# EAGLE board FR4%20Panel%20Rev%20A.brd (EAGLE 7.2.0)
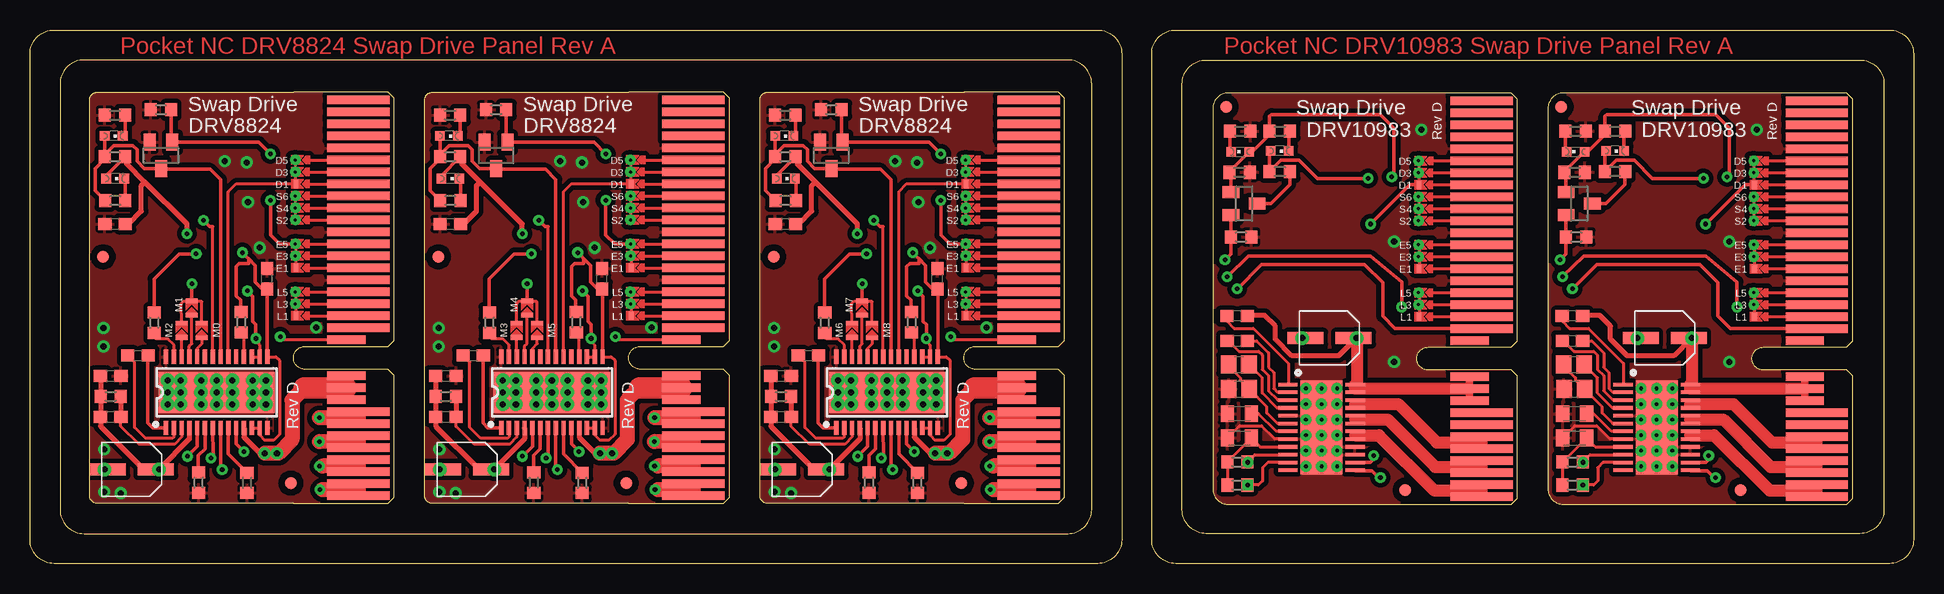
[diagram p0: board, top side]
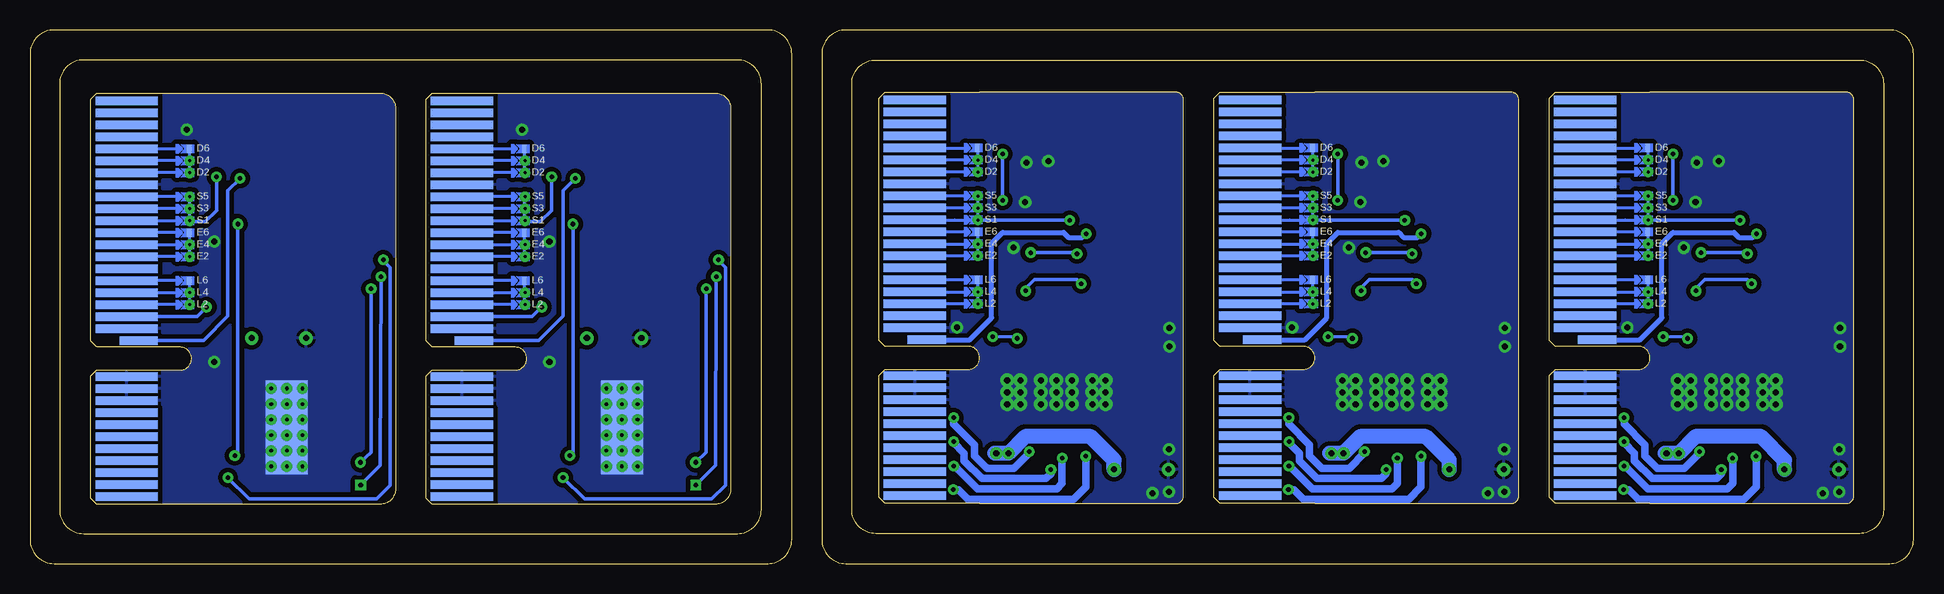
[diagram p1: board, bottom side, seen from below]

Size 157 x 44.5 mm. Coordinates in mm from the lower left corner, seen from the top.
Outline: 115.59,39.24 99.86,39.24 arc90 98.59,37.97 98.59,6.21 arc90 99.86,4.94 115.59,4.94
Outline: 21.96,5 5.59,5 arc-90 4.96,5.64 4.96,38.67 arc-90 5.59,39.3 21.96,39.3
Outline: 49.9,5 33.53,5 arc-90 32.9,5.64 32.9,38.67 arc-90 33.53,39.3 49.9,39.3
Outline: 77.84,5 61.47,5 arc-90 60.84,5.64 60.84,38.67 arc-90 61.47,39.3 77.84,39.3
Outline: 143.53,39.24 127.8,39.24 arc90 126.53,37.97 126.53,6.21 arc90 127.8,4.94 143.53,4.94
Outline: 2.5,40 2.5,4.5 arc90 4.5,2.5 86.5,2.5 arc90 88.5,4.5 88.5,40 arc90 86.5,42 4.5,42 arc90 2.5,40
Outline: 2,44.5 89,44.5 arc-90 91,42.5 91,2 arc-90 89,0 2,0 arc-90 0,2 0,42.5 arc-90 2,44.5
Outline: 152.54,2.5 98.04,2.5 arc-90 96.04,4.5 96.04,40 arc-90 98.04,42 152.54,42 arc-90 154.54,40 154.54,4.5 arc-90 152.54,2.5
Outline: 155,0 95.5,0 arc-90 93.5,2 93.5,42.5 arc-90 95.5,44.5 155,44.5 arc-90 157,42.5 157,2 arc-90 155,0
Copper layers (1*16): Top 0.035mm / dielectric 1.5mm / Bottom 0.035mm
Design rules "SparkFun *": minimum track width 8mil, minimum drill 20mil, track to track 15mil, track to pad 8mil, pad to pad 8mil, via to via 8mil, smd to smd 8mil, copper to edge 2mil, drill to drill 8mil, minimum pad ring 12mil, minimum via ring 10mil, stop-mask expansion 4mil, vias tented up to drill 0.7mm, thermal gap 10mil

## Footprints (pad centres in the part's own frame; a part is rotated, then mirrored left to right if it is on the bottom)
SOT23 = smd 1 x 1.4: 1 -0.95,-1.1; 2 0.95,-1.1; 3 0,1.1
C0603 = smd 1.1 x 1: 1 -0.85,0; 2 0.85,0
C0805K = smd 1.1 x 1.4: 1 -1,0; 2 1,0
C0805 = smd 1.3 x 1.5: 1 -0.85,0; 2 0.85,0
HTSSOP-28 = smd 0.36 x 1.19: 1 -4.225,-2.97; 2 -3.575,-2.97; 3 -2.925,-2.97; 4 -2.275,-2.97; 5 -1.625,-2.97; 6 -0.975,-2.97; 7 -0.325,-2.97; 8 0.325,-2.97; 9 0.975,-2.97; 10 1.625,-2.97; 11 2.275,-2.97; 12 2.925,-2.97; 13 3.575,-2.97; 14 4.225,-2.97; 15 4.225,2.97; 16 3.575,2.97; 17 2.925,2.97; 18 2.275,2.97; 19 1.625,2.97; 20 0.975,2.97; 21 0.325,2.97; 22 -0.325,2.97; 23 -0.975,2.97; 24 -1.625,2.97; 25 -2.275,2.97; 26 -2.925,2.97; 27 -3.575,2.97; 28 -4.225,2.97 | drill 0.508: GND@10 -4.1,1; GND@11 -4.1,0; GND@12 -4.1,-1; GND@13 -3,-1; GND@14 -3,0; GND@15 -3,1; GND@16 -1.3,1; GND@17 -1.3,0; GND@18 -1.3,-1; GND@19 0,-1; GND@20 0,0; GND@21 0,1; GND@22 1.3,1; GND@23 1.3,0; GND@24 1.3,-1; GND@25 3,-1; GND@26 3,0; GND@27 3,1; GND@28 4.1,1; GND@29 4.1,0; GND@30 4.1,-1 | smd 9.7 x 3.4: GND@PAD 0,0
CHIPLED_0603 = smd 0.8 x 0.8: A 0,-0.75; C 0,0.75
SELECTIVE_CONNECT = smd 0.4 x 1: P$1 0,0; P$2 1.2,0
R0603 = smd 1 x 1.1: 1 -0.85,0; 2 0.85,0
PCIE_64_SMART_BOARD = smd 0.7 x 5.2 bottom: GND@1 8.65,3; GND@2 9.65,3; GND@3 10.65,3; P$1 0.65,3; P$2 1.65,3; P$3 2.65,3; P$4 3.65,3; P$5 4.65,3; P$6 5.65,3; P$7 6.65,3; P$8 7.65,3; P$13 14.65,3; P$14 15.65,3; P$15 16.65,3; P$16 17.65,3; P$17 18.65,3; P$18 19.65,3; P$19 20.65,3; P$20 21.65,3; P$21 22.65,3; P$22 23.65,3; P$23 24.65,3; P$24 25.65,3; P$25 26.65,3; P$26 27.65,3; P$27 28.65,3; P$28 29.65,3; P$29 30.65,3; P$30 31.65,3; P$31 32.65,3; P$32 33.65,3 | smd 0.7 x 3.2 bottom: P$12 13.65,4 | smd 0.7 x 0.4 bottom: P$15@1 16.65,8.2; P$16@1 17.65,8.2; P$17@1 18.65,8.2; P$19@1 20.65,8.2; P$20@1 21.65,8.2; P$21@1 22.65,8.2; P$22@1 23.65,8.2; P$23@1 24.65,8.2; P$24@1 25.65,8.2; P$26@1 27.65,8.2; P$27@1 28.65,8.2; P$28@1 29.65,8.2 | smd 0.7 x 5.2: P$33 0.65,3; P$34 1.65,3; P$35 2.65,3; P$36 3.65,3; P$37 4.65,3; P$38 5.65,3; P$39 6.65,3; P$40 7.65,3; P$45 14.65,3; P$46 15.65,3; P$47 16.65,3; P$48 17.65,3; P$49 18.65,3; P$50 19.65,3; P$51 20.65,3; P$52 21.65,3; P$53 22.65,3; P$54 23.65,3; P$55 24.65,3; P$56 25.65,3; P$57 26.65,3; P$58 27.65,3; P$59 28.65,3; P$60 29.65,3; P$61 30.65,3; P$62 31.65,3; P$63 32.65,3; P$64 33.65,3 | drill 0.254 pad 0.305: P$41 21.65,8.25; P$42 17.65,8.25; P$43 16.65,8.25; P$65 20.65,8.25; P$66 23.65,8.25; P$67 24.65,8.25; P$68 27.65,8.25; P$69 28.65,8.25; P$70 25.65,8.25 | smd 0.7 x 3.2: P$44 13.65,4; VCC@1 8.65,4; VCC@2 9.65,4; VCC@3 10.65,4 | smd 0.7 x 0.4: P$46@1 15.65,8.2; P$47@1 16.65,8.2; P$48@1 17.65,8.2; P$50@1 19.65,8.2; P$51@1 20.65,8.2; P$52@1 21.65,8.2; P$54@1 23.65,8.2; P$55@1 24.65,8.2; P$56@1 25.65,8.2; P$57@1 26.65,8.2; P$58@1 27.65,8.2; P$59@1 28.65,8.2
HTSS0P-24 = smd 7.8 x 3.5 bottom: GND 0,0 | smd 7.8 x 3.5: GND@1 0,0 | drill 0.3: GND@3 -3.25,1.3; GND@4 -1.95,1.3; GND@5 -0.65,1.3; GND@6 0.65,1.3; GND@7 1.95,1.3; GND@8 3.25,1.3; GND@9 3.25,0; GND@10 1.95,0; GND@11 0.65,0; GND@12 -0.65,0; GND@13 -1.95,0; GND@14 -3.25,0; GND@15 -3.25,-1.3; GND@16 -1.95,-1.3; GND@17 -0.65,-1.3; GND@18 0.65,-1.3; GND@19 1.95,-1.3; GND@20 3.25,-1.3 | smd 0.3 x 1.6: P$1 -3.575,-2.8; P$2 -2.925,-2.8; P$3 -2.275,-2.8; P$4 -1.625,-2.8; P$5 -0.975,-2.8; P$6 -0.325,-2.8; P$7 0.325,-2.8; P$8 0.975,-2.8; P$9 1.625,-2.8; P$10 2.275,-2.8; P$11 2.925,-2.8; P$12 3.575,-2.8; P$13 3.575,2.8; P$14 2.925,2.8; P$15 2.275,2.8; P$16 1.625,2.8; P$17 0.975,2.8; P$18 0.325,2.8; P$19 -0.325,2.8; P$20 -0.975,2.8; P$21 -1.625,2.8; P$22 -2.275,2.8; P$23 -2.925,2.8; P$24 -3.575,2.8
EEEFK0J220R = smd 1 x 3: GND@1 0,-2; P$1 0,2 | drill 0.508: GND@2 0,-2.27; P$3 0,2.27
FIDUCIAL_1MM = smd 1 x 1: 1 0,0

## Placement (x,y rotation side)
2N7002P  [SOT23]  10.92,34.04 180 top
2N7002P1  [SOT23]  101.2,30.02 270 top
2N7002P2  [SOT23]  38.86,34.04 180 top
2N7002P3  [SOT23]  66.8,34.04 180 top
2N7002P4  [SOT23]  129.14,30.02 270 top
C1  4.7uf  [C0603]  19.76,23.76 90 top
C2  .1uf  [C0603]  100.62,20.64 180 top
C3  .1uf  [C0603]  100.63,18.57 0 top
C4  [C0805K]  100.82,12.5 0 top
C5  10uf  [C0805]  100.78,14.55 0 top
C6  .01uf  [C0603]  9,17.35 0 top
C7  [C0805K]  100.82,10.47 0 top
C8  .1uf  [C0603]  6.73,15.66 0 top
C9  .1uf  [C0603]  6.73,12.24 0 top
C10  .1uf  [C0603]  7.09,28.32 0 top
C11  4.7uf  [C0603]  47.7,23.76 90 top
C12  .01uf  [C0603]  36.94,17.35 0 top
C13  .1uf  [C0603]  34.67,15.66 0 top
C14  .1uf  [C0603]  34.67,12.24 0 top
C15  .1uf  [C0603]  35.03,28.32 0 top
C16  4.7uf  [C0603]  75.64,23.76 90 top
C17  .01uf  [C0603]  64.88,17.35 0 top
C18  .1uf  [C0603]  62.61,15.66 0 top
C19  .1uf  [C0603]  62.61,12.24 0 top
C20  .1uf  [C0603]  62.97,28.32 0 top
C21  .1uf  [C0603]  128.56,20.64 180 top
C22  .1uf  [C0603]  128.57,18.57 0 top
C23  10uf  [C0805]  128.72,14.55 0 top
C24  [C0805K]  128.76,10.47 0 top
C25  [C0805K]  128.76,12.5 0 top
DRV1  DRV8824  [HTSSOP-28]  43.5,14.28 0 top
DRV2  DRV8824  [HTSSOP-28]  71.44,14.28 0 top
DRV8824  DRV8824  [HTSSOP-28]  15.56,14.28 0 top
GRN  [CHIPLED_0603]  7.11,32.11 270 top
GRN1  [CHIPLED_0603]  104.18,34.41 270 top
GRN2  [CHIPLED_0603]  35.05,32.11 270 top
GRN3  [CHIPLED_0603]  62.99,32.11 270 top
GRN4  [CHIPLED_0603]  132.12,34.41 270 top
L1  47uh  [C0805]  100.76,16.61 0 top
L2  47uh  [C0805]  128.7,16.61 0 top
M0  SELECTIVE_CONNECT  [SELECTIVE_CONNECT]  14.33,18.83 90 top
M1  SELECTIVE_CONNECT  [SELECTIVE_CONNECT]  13.48,20.7 90 top
M2  SELECTIVE_CONNECT  [SELECTIVE_CONNECT]  12.64,18.85 90 top
M3  SELECTIVE_CONNECT  [SELECTIVE_CONNECT]  40.58,18.85 90 top
M4  SELECTIVE_CONNECT  [SELECTIVE_CONNECT]  41.42,20.7 90 top
M5  SELECTIVE_CONNECT  [SELECTIVE_CONNECT]  42.27,18.83 90 top
M6  SELECTIVE_CONNECT  [SELECTIVE_CONNECT]  68.52,18.85 90 top
M7  SELECTIVE_CONNECT  [SELECTIVE_CONNECT]  69.36,20.7 90 top
M8  SELECTIVE_CONNECT  [SELECTIVE_CONNECT]  70.21,18.83 90 top
R1  5k  [R0603]  100.64,8.47 0 top
R2  5k  [R0603]  100.64,6.54 0 top
R3  460  [R0603]  104.18,32.69 180 top
R4  10k  [R0603]  100.82,32.63 180 top
R5  10k  [R0603]  100.94,27.23 0 top
R6  10k  [R0603]  17.61,20.13 90 top
R7  10k  [R0603]  10.36,20.08 90 top
R8  [R0603]  14.06,6.75 90 top
R9  [R0603]  18.09,6.73 90 top
R10  460  [R0603]  100.88,36.06 0 top
R11  460  [R0603]  104.18,36.06 180 top
R12  1m  [R0603]  6.73,13.93 0 top
R13  10k  [R0603]  10.92,37.85 0 top
R14  460  [R0603]  7.08,33.93 0 top
R15  460  [R0603]  7.08,37.39 180 top
R16  460  [R0603]  7.11,30.28 180 top
R17  10k  [R0603]  45.55,20.13 90 top
R18  10k  [R0603]  38.3,20.08 90 top
R19  [R0603]  42,6.75 90 top
R20  [R0603]  46.03,6.73 90 top
R21  1m  [R0603]  34.67,13.93 0 top
R22  10k  [R0603]  38.86,37.85 0 top
R23  460  [R0603]  35.02,33.93 0 top
R24  460  [R0603]  35.02,37.39 180 top
R25  460  [R0603]  35.05,30.28 180 top
R26  10k  [R0603]  73.49,20.13 90 top
R27  10k  [R0603]  66.24,20.08 90 top
R28  [R0603]  69.94,6.75 90 top
R29  [R0603]  73.97,6.73 90 top
R30  1m  [R0603]  62.61,13.93 0 top
R31  10k  [R0603]  66.8,37.85 0 top
R32  460  [R0603]  62.96,33.93 0 top
R33  460  [R0603]  62.96,37.39 180 top
R34  460  [R0603]  62.99,30.28 180 top
R35  5k  [R0603]  128.58,8.47 0 top
R36  5k  [R0603]  128.58,6.54 0 top
R37  460  [R0603]  132.12,32.69 180 top
R38  10k  [R0603]  128.76,32.63 180 top
R39  10k  [R0603]  128.88,27.23 0 top
R40  460  [R0603]  128.82,36.06 0 top
R41  460  [R0603]  132.12,36.06 180 top
RED  [CHIPLED_0603]  6.98,35.66 270 top
RED1  [CHIPLED_0603]  100.88,34.34 90 top
RED2  [CHIPLED_0603]  34.92,35.66 270 top
RED3  [CHIPLED_0603]  62.86,35.66 270 top
RED4  [CHIPLED_0603]  128.82,34.34 90 top
U$1  [PCIE_64_SMART_BOARD]  123.99,4.94 90 top
U$2  DRV10983  [HTSS0P-24]  107.65,11.35 270 top
U$3  10uf  [EEEFK0J220R]  108.31,18.81 270 top
U$4  FIDUCIAL  [FIDUCIAL_1MM]  99.69,38.09 90 top
U$5  FIDUCIAL  [FIDUCIAL_1MM]  114.64,6.13 90 top
U$6  [PCIE_64_SMART_BOARD]  30.36,5 90 top
U$7  EEEFK0J220R  [EEEFK0J220R]  8.49,7.85 270 top
U$8  FIDUCIAL  [FIDUCIAL_1MM]  21.75,6.71 90 top
U$9  FIDUCIAL  [FIDUCIAL_1MM]  6.1,25.58 90 top
U$10  [PCIE_64_SMART_BOARD]  58.3,5 90 top
U$11  EEEFK0J220R  [EEEFK0J220R]  36.43,7.85 270 top
U$12  FIDUCIAL  [FIDUCIAL_1MM]  49.69,6.71 90 top
U$13  FIDUCIAL  [FIDUCIAL_1MM]  34.04,25.58 90 top
U$14  [PCIE_64_SMART_BOARD]  86.24,5 90 top
U$15  EEEFK0J220R  [EEEFK0J220R]  64.37,7.85 270 top
U$16  FIDUCIAL  [FIDUCIAL_1MM]  77.63,6.71 90 top
U$17  FIDUCIAL  [FIDUCIAL_1MM]  61.98,25.58 90 top
U$18  [PCIE_64_SMART_BOARD]  151.93,4.94 90 top
U$19  DRV10983  [HTSS0P-24]  135.59,11.35 270 top
U$20  10uf  [EEEFK0J220R]  136.25,18.81 270 top
U$21  FIDUCIAL  [FIDUCIAL_1MM]  127.63,38.09 90 top
U$22  FIDUCIAL  [FIDUCIAL_1MM]  142.58,6.13 90 top

## Library data of the parts
2N7002P 2N7002P1-2N7002P4 C1-C25 GRN GRN1-GRN4 L1 L2 R1-R41 RED RED1-RED4 U$4 U$5 U$8 U$9 U$12 U$13 U$16 U$17 U$21 U$22 = adafruit
DRV1 DRV2 DRV8824 M0 M1-M8 U$1-U$3 U$6 U$7 U$10 U$11 U$14 U$15 U$18-U$20 = PocketNC

## Nets
3.3V: C1.1 DRV8824.12 DRV8824.13 DRV8824.15 R6.2 R7.2
3.3V1: C11.1 DRV1.12 DRV1.13 DRV1.15 R17.2 R18.2
3.3V2: C16.1 DRV2.12 DRV2.13 DRV2.15 R26.2 R27.2
3V: GRN1.A R3.2 U$1.P$12
3V1: C10.2 GRN.A R14.2 U$6.P$12
3V2: C15.2 GRN2.A R23.2 U$10.P$12
3V3: C20.2 GRN3.A R32.2 U$14.P$12
3V4: GRN4.A R37.2 U$18.P$12
5V: DRV8824.16 DRV8824.17 M0.P$2 M1.P$2 M2.P$2 U$6.P$44
5V1: DRV1.16 DRV1.17 M3.P$2 M4.P$2 M5.P$2 U$10.P$44
5V2: DRV2.16 DRV2.17 M6.P$2 M7.P$2 M8.P$2 U$14.P$44
A1: DRV8824.5 U$6.P$33 U$6.P$34
A2: DRV8824.7 U$6.P$35 U$6.P$36
A3: DRV1.5 U$10.P$33 U$10.P$34
A4: DRV1.7 U$10.P$35 U$10.P$36
A5: DRV2.5 U$14.P$33 U$14.P$34
A6: DRV2.7 U$14.P$35 U$14.P$36
B1: DRV8824.10 U$6.P$39 U$6.P$40
B2: DRV8824.8 U$6.P$37 U$6.P$38
B3: DRV1.8 U$10.P$37 U$10.P$38
B4: DRV1.10 U$10.P$39 U$10.P$40
B5: DRV2.8 U$14.P$37 U$14.P$38
B6: DRV2.10 U$14.P$39 U$14.P$40
DIR: U$1.P$57@1 U$2.P$14
DIR1: DRV8824.20 U$6.P$57@1
DIR2: DRV1.20 U$10.P$57@1
DIR3: DRV2.20 U$14.P$57@1
DIR4: U$18.P$57@1 U$19.P$14
ENBL: 2N7002P1.1 R4.2 R11.2 RED1.A U$1.P$22@1
ENBL1: 2N7002P4.1 R38.2 R41.2 RED4.A U$18.P$22@1
ENBL-IN: 2N7002P.1 R13.2 U$6.P$50@1
ENBL-IN1: 2N7002P2.1 R22.2 U$10.P$50@1
ENBL-IN2: 2N7002P3.1 R31.2 U$14.P$50@1
ENBL-OUT: 2N7002P.3 DRV8824.21 R14.1 R16.2 RED.A
ENBL-OUT1: 2N7002P2.3 DRV1.21 R23.1 R25.2 RED2.A
ENBL-OUT2: 2N7002P3.3 DRV2.21 R32.1 R34.2 RED3.A
GND: C4.1 C5.1 C7.1 R4.1 R5.2 R10.2 U$1.GND@1 U$1.GND@2 U$1.GND@3 U$1.P$13 U$1.P$25 U$1.P$49 U$1.P$53 U$1.P$60 U$2.GND U$2.GND@1 U$2.GND@3 U$2.GND@4 U$2.GND@5 U$2.GND@6 U$2.GND@7 U$2.GND@8 U$2.GND@9 U$2.GND@10 U$2.GND@11 U$2.GND@12 U$2.GND@13 U$2.GND@14 U$2.GND@15 U$2.GND@16 U$2.GND@17 U$2.GND@18 U$2.GND@19 U$2.GND@20 U$2.P$5 U$2.P$8 U$2.P$15 U$2.P$16 U$3.GND@2
GND1: 2N7002P.2 C1.2 C8.2 C10.1 DRV8824.14 DRV8824.28 DRV8824.GND@10 DRV8824.GND@11 DRV8824.GND@12 DRV8824.GND@13 DRV8824.GND@14 DRV8824.GND@15 DRV8824.GND@16 DRV8824.GND@17 DRV8824.GND@18 DRV8824.GND@19 DRV8824.GND@20 DRV8824.GND@21 DRV8824.GND@22 DRV8824.GND@23 DRV8824.GND@24 DRV8824.GND@25 DRV8824.GND@26 DRV8824.GND@27 DRV8824.GND@28 DRV8824.GND@29 DRV8824.GND@30 DRV8824.GND@PAD R8.1 R9.1 R13.1 R15.2 U$6.GND@1 U$6.GND@2 U$6.GND@3 U$6.P$13 U$6.P$25 U$6.P$49 U$6.P$53 U$6.P$60 U$7.GND@2
GND2: 2N7002P2.2 C11.2 C13.2 C15.1 DRV1.14 DRV1.28 DRV1.GND@10 DRV1.GND@11 DRV1.GND@12 DRV1.GND@13 DRV1.GND@14 DRV1.GND@15 DRV1.GND@16 DRV1.GND@17 DRV1.GND@18 DRV1.GND@19 DRV1.GND@20 DRV1.GND@21 DRV1.GND@22 DRV1.GND@23 DRV1.GND@24 DRV1.GND@25 DRV1.GND@26 DRV1.GND@27 DRV1.GND@28 DRV1.GND@29 DRV1.GND@30 DRV1.GND@PAD R19.1 R20.1 R22.1 R24.2 U$10.GND@1 U$10.GND@2 U$10.GND@3 U$10.P$13 U$10.P$25 U$10.P$49 U$10.P$53 U$10.P$60 U$11.GND@2
GND3: 2N7002P3.2 C16.2 C18.2 C20.1 DRV2.14 DRV2.28 DRV2.GND@10 DRV2.GND@11 DRV2.GND@12 DRV2.GND@13 DRV2.GND@14 DRV2.GND@15 DRV2.GND@16 DRV2.GND@17 DRV2.GND@18 DRV2.GND@19 DRV2.GND@20 DRV2.GND@21 DRV2.GND@22 DRV2.GND@23 DRV2.GND@24 DRV2.GND@25 DRV2.GND@26 DRV2.GND@27 DRV2.GND@28 DRV2.GND@29 DRV2.GND@30 DRV2.GND@PAD R28.1 R29.1 R31.1 R33.2 U$14.GND@1 U$14.GND@2 U$14.GND@3 U$14.P$13 U$14.P$25 U$14.P$49 U$14.P$53 U$14.P$60 U$15.GND@2
GND4: C23.1 C24.1 C25.1 R38.1 R39.2 R40.2 U$18.GND@1 U$18.GND@2 U$18.GND@3 U$18.P$13 U$18.P$25 U$18.P$49 U$18.P$53 U$18.P$60 U$19.GND U$19.GND@1 U$19.GND@3 U$19.GND@4 U$19.GND@5 U$19.GND@6 U$19.GND@7 U$19.GND@8 U$19.GND@9 U$19.GND@10 U$19.GND@11 U$19.GND@12 U$19.GND@13 U$19.GND@14 U$19.GND@15 U$19.GND@16 U$19.GND@17 U$19.GND@18 U$19.GND@19 U$19.GND@20 U$19.P$5 U$19.P$8 U$19.P$15 U$19.P$16 U$20.GND@2
N$1: C2.2 U$2.P$1
N$2: C3.2 U$2.P$2
N$3: C3.1 U$2.P$3
N$4: DRV8824.6 R8.2
N$5: R10.1 RED1.C
N$6: C4.2 U$2.P$7
N$7: C6.2 DRV8824.1
N$8: GRN1.C R11.1
N$9: 2N7002P1.3 R3.1
N$10: C6.1 DRV8824.2
N$11: DRV8824.9 R9.2
N$12: DRV8824.18 R6.1
N$13: GRN.C R16.1
N$14: R15.1 RED.C
N$15: DRV1.6 R19.2
N$16: DRV8824.27 R7.1
N$17: DRV8824.26 M2.P$1
N$18: DRV8824.25 M1.P$1
N$19: DRV8824.24 M0.P$1
N$20: DRV1.27 R18.1
N$21: DRV1.26 M3.P$1
N$22: DRV1.25 M4.P$1
N$23: DRV1.24 M5.P$1
N$24: C12.2 DRV1.1
N$25: C12.1 DRV1.2
N$26: DRV1.9 R20.2
N$27: DRV1.18 R17.1
N$28: GRN2.C R25.1
N$29: R24.1 RED2.C
N$30: DRV2.6 R28.2
N$31: DRV2.27 R27.1
N$32: DRV2.26 M6.P$1
N$33: DRV2.25 M7.P$1
N$34: DRV2.24 M8.P$1
N$35: C17.2 DRV2.1
N$36: C17.1 DRV2.2
N$37: DRV2.9 R29.2
N$38: DRV2.18 R26.1
N$39: GRN3.C R34.1
N$40: R33.1 RED3.C
N$41: C21.2 U$19.P$1
N$42: C22.2 U$19.P$2
N$43: C22.1 U$19.P$3
N$44: C25.2 U$19.P$7
N$45: 2N7002P4.3 R37.1
N$46: R40.1 RED4.C
N$47: GRN4.C R41.1
PWM: 2N7002P1.2 R5.1 U$2.P$13
PWM1: 2N7002P4.2 R39.1 U$19.P$13
SCL: R1.2 U$1.P$45 U$2.P$10
SCL1: R35.2 U$18.P$45 U$19.P$10
SDA: R2.2 U$1.P$14 U$2.P$11
SDA1: R36.2 U$18.P$14 U$19.P$11
STEP: DRV8824.22 U$6.P$22@1
STEP1: DRV1.22 U$10.P$22@1
STEP2: DRV2.22 U$14.P$22@1
SW: L1.2 U$2.P$4
SW1: L2.2 U$19.P$4
U: U$1.P$33 U$1.P$34 U$2.P$17 U$2.P$18
U1: U$18.P$33 U$18.P$34 U$19.P$17 U$19.P$18
V: U$1.P$35 U$1.P$36 U$2.P$19 U$2.P$20
V1: U$18.P$35 U$18.P$36 U$19.P$19 U$19.P$20
V3P1: C24.2 R35.1 R36.1 U$19.P$9
V3P3: C7.2 R1.1 R2.1 U$2.P$9
VCC: C2.1 U$1.VCC@1 U$1.VCC@2 U$1.VCC@3 U$2.P$23 U$2.P$24 U$3.P$3
VCC1: C8.1 C9.1 DRV8824.4 DRV8824.11 R12.1 U$6.VCC@1 U$6.VCC@2 U$6.VCC@3 U$7.P$3
VCC2: C13.1 C14.1 DRV1.4 DRV1.11 R21.1 U$10.VCC@1 U$10.VCC@2 U$10.VCC@3 U$11.P$3
VCC3: C18.1 C19.1 DRV2.4 DRV2.11 R30.1 U$14.VCC@1 U$14.VCC@2 U$14.VCC@3 U$15.P$3
VCC4: C21.1 U$18.VCC@1 U$18.VCC@2 U$18.VCC@3 U$19.P$23 U$19.P$24 U$20.P$3
VCP: C9.2 DRV8824.3 R12.2
VCP1: C14.2 DRV1.3 R21.2
VCP2: C19.2 DRV2.3 R30.2
VREG: C5.2 L1.1 U$2.P$6
VREG1: C23.2 L2.1 U$19.P$6
W: U$1.P$37 U$1.P$38 U$2.P$21 U$2.P$22
W1: U$18.P$37 U$18.P$38 U$19.P$21 U$19.P$22

## Tracks (layer width: path | path; a pad name or v marks a point on that pad's centre or on a via)
3.3V  (via drill 0.38)
  Top 0.254: DRV8824.12 DRV8824.13 19.14,10.71 19.58,10.27 20.3,10.27 20.81,10.78 20.81,16.93 20.49,17.25 DRV8824.15
  Top 0.305: DRV8824.15 19.79,22.88 C1.1 19.37,22.91 18.78,23.5 18.78,24.87 18.22,25.43 | R6.2 17.56,21.03 17.56,21.97 17.2,22.33 17.2,24.77 17.46,25.02 18.22,25.02 18.22,25.43 | 18.22,25.43 18.07,25.58 v17.71,25.93 | v13.85,25.83 12.43,25.83 10.34,23.75 10.34,20.95 R7.2
  Bottom 0.305: v17.71,25.93 13.95,25.93 v13.85,25.83
3.3V1  (via drill 0.38)
  Top 0.254: DRV1.12 DRV1.13 47.08,10.71 47.52,10.27 48.24,10.27 48.75,10.78 48.75,16.93 48.43,17.25 DRV1.15
  Top 0.305: DRV1.15 47.73,22.88 C11.1 47.31,22.91 46.72,23.5 46.72,24.87 46.16,25.43 | R17.2 45.5,21.03 45.5,21.97 45.14,22.33 45.14,24.77 45.4,25.02 46.16,25.02 46.16,25.43 | 46.16,25.43 46.01,25.58 v45.65,25.93 | v41.79,25.83 40.37,25.83 38.28,23.75 38.28,20.95 R18.2
  Bottom 0.305: v45.65,25.93 41.89,25.93 v41.79,25.83
3.3V2  (via drill 0.38)
  Top 0.254: DRV2.12 DRV2.13 75.02,10.71 75.46,10.27 76.18,10.27 76.69,10.78 76.69,16.93 76.37,17.25 DRV2.15
  Top 0.305: DRV2.15 75.67,22.88 C16.1 75.25,22.91 74.66,23.5 74.66,24.87 74.1,25.43 | R26.2 73.44,21.03 73.44,21.97 73.08,22.33 73.08,24.77 73.34,25.02 74.1,25.02 74.1,25.43 | 74.1,25.43 73.95,25.58 v73.59,25.93 | v69.73,25.83 68.31,25.83 66.22,23.75 66.22,20.95 R27.2
  Bottom 0.305: v73.59,25.93 69.83,25.93 v69.73,25.83
3V  (via drill 0.38)
  Top 0.305: GRN1.A 103.33,34.31 R3.2 104.28,33.65 105.77,33.65 107.29,32.12 v111.55,32.12
  Bottom 0.305: U$1.P$12 114.6,18.59 112.56,20.63 112.56,31.11 v111.55,32.12
3V1  (via drill 0.38)
  Top 0.305: GRN.A 6.36,32.36 R14.2 8.06,33.81 8.06,33.35
  Top 0.406: v13.09,27.51 13.09,28.32 9.58,31.83 | 9.58,31.83 8.06,33.35 | C10.2 8.21,28.32 9.28,29.39 9.28,31.52 9.58,31.83
  Bottom 0.406: U$6.P$12 22.81,18.65 20.96,20.5 20.96,26.7 20.05,27.61 14.97,27.61 14.56,27.2 13.39,27.2 v13.09,27.51
3V2  (via drill 0.38)
  Top 0.305: GRN2.A 34.3,32.36 R23.2 36,33.81 36,33.35
  Top 0.406: v41.03,27.51 41.03,28.32 37.52,31.83 | 37.52,31.83 36,33.35 | C15.2 36.15,28.32 37.22,29.39 37.22,31.52 37.52,31.83
  Bottom 0.406: U$10.P$12 50.75,18.65 48.9,20.5 48.9,26.7 47.99,27.61 42.91,27.61 42.5,27.2 41.33,27.2 v41.03,27.51
3V3  (via drill 0.38)
  Top 0.305: GRN3.A 62.24,32.36 R32.2 63.94,33.81 63.94,33.35
  Top 0.406: v68.97,27.51 68.97,28.32 65.46,31.83 | 65.46,31.83 63.94,33.35 | C20.2 64.09,28.32 65.16,29.39 65.16,31.52 65.46,31.83
  Bottom 0.406: U$14.P$12 78.69,18.65 76.84,20.5 76.84,26.7 75.93,27.61 70.85,27.61 70.44,27.2 69.27,27.2 v68.97,27.51
3V4  (via drill 0.38)
  Top 0.305: GRN4.A 131.27,34.31 R37.2 132.22,33.65 133.71,33.65 135.23,32.12 v139.49,32.12
  Bottom 0.305: U$18.P$12 142.54,18.59 140.5,20.63 140.5,31.11 v139.49,32.12
5V  (via drill 0.38)
  Top 0.254: DRV8824.17 DRV8824.16 19.13,18.21 18.83,18.52 v18.83,18.77 | M2.P$2 12.61,21.69 12.81,21.88 13.48,21.88 M1.P$2 13.58,21.86 14.28,21.86 14.33,21.81 M0.P$2 | U$6.P$44 21.13,18.65 v20.86,18.92
  Top 0.305: v18.83,18.77 18.83,19.94 18.58,20.19 18.58,22.28 v18.12,22.73 | v13.49,23.34 13.49,21.92 M1.P$2
  Bottom 0.254: v20.86,18.92 18.98,18.92 v18.83,18.77
  Bottom 0.305: v18.12,22.73 18.12,22.99 17.41,23.7 13.85,23.7 v13.49,23.34
5V1  (via drill 0.38)
  Top 0.254: DRV1.17 DRV1.16 47.07,18.21 46.77,18.52 v46.77,18.77 | M3.P$2 40.56,21.69 40.75,21.88 41.42,21.88 M4.P$2 41.52,21.86 42.22,21.86 42.27,21.81 M5.P$2 | U$10.P$44 49.07,18.65 v48.8,18.92
  Top 0.305: v46.77,18.77 46.77,19.94 46.52,20.19 46.52,22.28 v46.06,22.73 | v41.44,23.34 41.44,21.92 M4.P$2
  Bottom 0.254: v48.8,18.92 46.92,18.92 v46.77,18.77
  Bottom 0.305: v46.06,22.73 46.06,22.99 45.35,23.7 41.79,23.7 v41.44,23.34
5V2  (via drill 0.38)
  Top 0.254: DRV2.17 DRV2.16 75.01,18.21 74.71,18.52 v74.71,18.77 | M6.P$2 68.5,21.69 68.69,21.88 69.36,21.88 M7.P$2 69.46,21.86 70.16,21.86 70.21,21.81 M8.P$2 | U$14.P$44 77.01,18.65 v76.74,18.92
  Top 0.305: v74.71,18.77 74.71,19.94 74.45,20.19 74.45,22.28 v74,22.73 | v69.38,23.34 69.38,21.92 M7.P$2
  Bottom 0.254: v76.74,18.92 74.86,18.92 v74.71,18.77
  Bottom 0.305: v74,22.73 74,22.99 73.29,23.7 69.73,23.7 v69.38,23.34
A1  (via drill 0.38)
  Top 0.254: U$6.P$34 27.36,6.15 | 24.38,6.16 24.39,6.15
  Top 0.305: DRV8824.5 13.94,9.77 v13.11,8.94 | U$6.P$33 27.36,6.15
  Top 0.61: v24.16,6.16 24.38,6.16
  Top 1.27: 27.36,6.15 24.39,6.15
  Bottom 0.61: v13.11,8.94 13.11,6.39 14.14,5.36 22.92,5.36 23.72,6.16 v24.16,6.16
A2  (via drill 0.38)
  Top 0.254: U$6.P$36 27.36,8.13 | 24.38,8.12 24.39,8.13
  Top 0.305: DRV8824.7 15.25,8.97 v15.08,8.8 | U$6.P$35 27.36,8.13
  Top 0.61: v24.12,8.13 24.38,8.12
  Top 1.27: 27.36,8.13 24.39,8.13
  Bottom 0.61: v15.08,8.8 15.08,6.67 15.53,6.22 22.16,6.22 24.06,8.13 v24.12,8.13
A3  (via drill 0.38)
  Top 0.254: U$10.P$34 55.3,6.15 | 52.32,6.16 52.33,6.15
  Top 0.305: DRV1.5 41.88,9.77 v41.05,8.94 | U$10.P$33 55.3,6.15
  Top 0.61: v52.1,6.16 52.32,6.16
  Top 1.27: 55.3,6.15 52.33,6.15
  Bottom 0.61: v41.05,8.94 41.05,6.39 42.08,5.36 50.86,5.36 51.66,6.16 v52.1,6.16
A4  (via drill 0.38)
  Top 0.254: U$10.P$36 55.3,8.13 | 52.32,8.12 52.33,8.13
  Top 0.305: DRV1.7 43.19,8.97 v43.02,8.8 | U$10.P$35 55.3,8.13
  Top 0.61: v52.06,8.13 52.32,8.12
  Top 1.27: 55.3,8.13 52.33,8.13
  Bottom 0.61: v43.02,8.8 43.02,6.67 43.47,6.22 50.1,6.22 52,8.13 v52.06,8.13
A5  (via drill 0.38)
  Top 0.254: U$14.P$34 83.24,6.15 | 80.26,6.16 80.27,6.15
  Top 0.305: DRV2.5 69.82,9.77 v68.99,8.94 | U$14.P$33 83.24,6.15
  Top 0.61: v80.04,6.16 80.26,6.16
  Top 1.27: 83.24,6.15 80.27,6.15
  Bottom 0.61: v68.99,8.94 68.99,6.39 70.02,5.36 78.8,5.36 79.6,6.16 v80.04,6.16
A6  (via drill 0.38)
  Top 0.254: U$14.P$36 83.24,8.13 | 80.26,8.12 80.27,8.13
  Top 0.305: DRV2.7 71.13,8.97 v70.96,8.8 | U$14.P$35 83.24,8.13
  Top 0.61: v80,8.13 80.26,8.12
  Top 1.27: 83.24,8.13 80.27,8.13
  Bottom 0.61: v70.96,8.8 70.96,6.67 71.41,6.22 78.04,6.22 79.94,8.13 v80,8.13
B1  (via drill 0.38)
  Top 0.254: U$6.P$40 27.36,12.15
  Top 0.305: DRV8824.10 17.19,9.96 v17.83,9.32 | U$6.P$39 27.36,12.15
  Top 1.27: 27.36,12.15 v24.12,12.15
  Bottom 0.61: v17.83,9.32 17.83,9.22 19.1,7.95 21.36,7.95 22.4,8.99 22.4,9.91 24.12,11.63 v24.12,12.15
B2  (via drill 0.38)
  Top 0.254: U$6.P$38 27.36,10.16
  Top 0.305: DRV8824.8 15.89,7.97 v16.02,7.84 | U$6.P$37 27.36,10.11 27.31,10.16
  Top 1.27: 27.36,10.16 27.31,10.16 v24.11,10.17
  Bottom 0.61: v16.02,7.84 16.02,7.48 16.42,7.09 21.77,7.09 23.26,8.57 23.26,9.21 24.11,10.06 v24.11,10.17
B3  (via drill 0.38)
  Top 0.254: U$10.P$38 55.3,10.16
  Top 0.305: DRV1.8 43.83,7.97 v43.96,7.84 | U$10.P$37 55.3,10.11 55.25,10.16
  Top 1.27: 55.3,10.16 55.25,10.16 v52.05,10.17
  Bottom 0.61: v43.96,7.84 43.96,7.48 44.36,7.09 49.72,7.09 51.2,8.57 51.2,9.21 52.05,10.06 v52.05,10.17
B4  (via drill 0.38)
  Top 0.254: U$10.P$40 55.3,12.15
  Top 0.305: DRV1.10 45.13,9.96 v45.77,9.32 | U$10.P$39 55.3,12.15
  Top 1.27: 55.3,12.15 v52.06,12.15
  Bottom 0.61: v45.77,9.32 45.77,9.22 47.03,7.95 49.3,7.95 50.34,8.99 50.34,9.91 52.06,11.63 v52.06,12.15
B5  (via drill 0.38)
  Top 0.254: U$14.P$38 83.24,10.16
  Top 0.305: DRV2.8 71.77,7.97 v71.9,7.84 | U$14.P$37 83.24,10.11 83.19,10.16
  Top 1.27: 83.24,10.16 83.19,10.16 v79.99,10.17
  Bottom 0.61: v71.9,7.84 71.9,7.48 72.3,7.09 77.66,7.09 79.14,8.57 79.14,9.21 79.99,10.06 v79.99,10.17
B6  (via drill 0.38)
  Top 0.254: U$14.P$40 83.24,12.15
  Top 0.305: DRV2.10 73.07,9.96 v73.71,9.32 | U$14.P$39 83.24,12.15
  Top 1.27: 83.24,12.15 v80,12.15
  Bottom 0.61: v73.71,9.32 73.71,9.22 74.97,7.95 77.24,7.95 78.28,8.99 78.28,9.91 80,11.63 v80,12.15
DIR  (via drill 0.38)
  Top 0.305: U$1.P$57@1 115.02,31.59 v111.74,28.31 | v111.99,9.01 111.99,8.69 111.74,8.44 110.46,8.44 U$2.P$14
  Bottom 0.305: v111.74,28.31 111.74,9.26 v111.99,9.01
DIR1
  Top 0.254: DRV8824.20 16.54,31.01 17.2,31.67 22.14,31.67 U$6.P$57@1
DIR2
  Top 0.254: DRV1.20 44.48,31.01 45.14,31.67 50.08,31.67 U$10.P$57@1
DIR3
  Top 0.254: DRV2.20 72.42,31.01 73.08,31.67 78.02,31.67 U$14.P$57@1
DIR4  (via drill 0.38)
  Top 0.305: U$18.P$57@1 142.96,31.59 v139.68,28.31 | v139.93,9.01 139.93,8.69 139.68,8.44 138.4,8.44 U$19.P$14
  Bottom 0.305: v139.68,28.31 139.68,9.26 v139.93,9.01
ENBL  (via drill 0.38)
  Top 0.305: 2N7002P1.1 100.1,32.5 R4.2 99.97,32.68 RED1.A 101.9,34.34 103.1,35.55 103.1,35.83 R11.2 103.33,37.3 103.48,37.45 112.56,37.45 113.71,36.31 113.71,32.44 v113.52,32.25
  Bottom 0.305: v113.52,32.25 113.52,29.45 114.47,28.5 115.7,28.5 U$1.P$22@1
ENBL1  (via drill 0.38)
  Top 0.305: 2N7002P4.1 128.04,32.5 R38.2 127.91,32.68 RED4.A 129.84,34.34 131.04,35.55 131.04,35.83 R41.2 131.27,37.3 131.42,37.45 140.5,37.45 141.65,36.31 141.65,32.44 v141.46,32.25
  Bottom 0.305: v141.46,32.25 141.46,29.45 142.41,28.5 143.64,28.5 U$18.P$22@1
ENBL-IN  (via drill 0.38)
  Top 0.305: R13.2 11.77,35.24 2N7002P.1 19.08,35.14 v20.05,34.16 | 22.16,26.7 22.1,26.64 20.81,26.64 20.05,27.41 v20.05,30.3
  Bottom 0.305: v20.05,34.16 v20.05,30.3
ENBL-IN1  (via drill 0.38)
  Top 0.305: R22.2 39.71,35.24 2N7002P2.1 47.02,35.14 v47.99,34.16 | 50.1,26.7 50.04,26.64 48.75,26.64 47.99,27.41 v47.99,30.3
  Bottom 0.305: v47.99,34.16 v47.99,30.3
ENBL-IN2  (via drill 0.38)
  Top 0.305: R31.2 67.65,35.24 2N7002P3.1 74.95,35.14 v75.93,34.16 | 78.04,26.7 77.98,26.64 76.69,26.64 75.93,27.41 v75.93,30.3
  Bottom 0.305: v75.93,34.16 v75.93,30.3
ENBL-OUT
  Top 0.305: RED.A R14.1 | R14.1 6.23,33.76 5.42,32.94 5.42,31.12 R16.2 | R14.1 6.23,34.11 6.99,34.87 8.57,34.87 8.92,34.52 8.92,33.55 9.53,32.94 10.91,32.94 2N7002P.3 10.96,32.89 15.02,32.89 15.89,32.02 DRV8824.21
ENBL-OUT1
  Top 0.305: RED2.A R23.1 | R23.1 34.17,33.76 33.36,32.94 33.36,31.12 R25.2 | R23.1 34.17,34.11 34.93,34.87 36.51,34.87 36.86,34.52 36.86,33.55 37.47,32.94 2N7002P2.3 38.9,32.89 42.96,32.89 43.83,32.02 DRV1.21
ENBL-OUT2
  Top 0.305: RED3.A R32.1 | R32.1 62.11,33.76 61.3,32.94 61.3,31.12 R34.2 | R32.1 62.11,34.11 62.87,34.87 64.45,34.87 64.8,34.52 64.8,33.55 65.41,32.94 2N7002P3.3 66.84,32.89 70.9,32.89 71.77,32.02 DRV2.21
GND  (via drill 0.51)
  Top 0.254: C7.1 100.82,11.47 100.82,11.48 102.66,11.48 103.76,10.38 U$2.P$8
  other vias: 115.99,36.18 113.71,16.82 113.71,26.85
  pour Top: 98.5,4.96 120.99,4.96 120.99,39.18 98.5,39.18
  pour Bottom: 98.5,4.96 120.99,4.96 120.99,39.18 98.5,39.18
GND1  (via drill 0.51)
  other vias: 6.18,9.52 6.13,18.11 6.13,19.63 18.17,30.15 19.13,26.34 18.07,33.45 16.24,33.55 6.18,5.97 7.55,5.87 23.86,19.68
  pour Bottom: 4.96,4.93 4.87,39.5 28.3,39.46 28.39,4.89
  pour Top: 4.95,4.93 4.88,39.52 28.29,39.45 28.42,4.93
GND2  (via drill 0.51)
  other vias: 34.12,9.52 34.07,18.11 34.07,19.63 46.11,30.15 47.07,26.34 46.01,33.45 44.18,33.55 34.12,5.97 35.49,5.87 51.8,19.68
  pour Bottom: 32.9,4.93 32.81,39.5 56.24,39.46 56.33,4.89
  pour Top: 32.89,4.93 32.82,39.52 56.23,39.45 56.36,4.93
GND3  (via drill 0.51)
  other vias: 62.06,9.52 62.01,18.11 62.01,19.63 74.05,30.15 75.01,26.34 73.95,33.45 72.12,33.55 62.06,5.97 63.43,5.87 79.74,19.68
  pour Bottom: 60.84,4.93 60.75,39.5 84.18,39.46 84.27,4.89
  pour Top: 60.83,4.93 60.76,39.52 84.17,39.45 84.3,4.93
GND4  (via drill 0.51)
  Top 0.254: C24.1 128.76,11.47 128.76,11.48 130.6,11.48 131.7,10.38 U$19.P$8
  other vias: 143.93,36.18 141.65,16.82 141.65,26.85
  pour Top: 126.44,4.96 148.93,4.96 148.93,39.18 126.44,39.18
  pour Bottom: 126.44,4.96 148.93,4.96 148.93,39.18 126.44,39.18
N$1
  Top 0.254: C2.2 99.77,20.21 100.37,19.61 101.96,19.61 104.88,16.69 104.88,14.95 U$2.P$1
N$2
  Top 0.254: C3.2 102.24,18.57 103.23,17.58 103.23,16.37 103.67,15.93 103.67,14.6 103.99,14.28 U$2.P$2
N$3
  Top 0.254: C3.1 99.89,18.57 100.75,17.71 102.41,17.71 102.72,17.39 102.72,16.18 103.23,15.67 103.23,14.4 104.01,13.63 U$2.P$3
N$4
  Top 0.305: DRV8824.6 14.59,9.55 14.04,9 14.04,7.62 R8.2
N$5
  Top 0.305: R10.1 100.03,34.44 RED1.C
N$6
  Top 0.254: U$2.P$7 103.88,11.03 102.41,12.5 C4.2
N$7
  Top 0.305: DRV8824.1 10.21,11.31 9.81,11.71 9.81,17.31 C6.2
N$8
  Top 0.305: GRN1.C 104.93,35.96 R11.1
N$9
  Top 0.305: 2N7002P1.3 103.42,30.02 105.01,31.61 105.01,32.67 R3.1
N$10
  Top 0.254: DRV8824.2 11.99,10.56 11.87,10.44 9.63,10.44 8.72,11.35 8.72,16.79 C6.1
N$11
  Top 0.305: DRV8824.9 16.54,9.13 R9.2
N$12
  Top 0.254: DRV8824.18 17.84,19.3 R6.1
N$13
  Top 0.305: R16.1 7.96,32.01 GRN.C
N$14
  Top 0.305: R15.1 7.93,35.86 RED.C
N$15
  Top 0.305: DRV1.6 42.53,9.55 41.98,9 41.98,7.62 R19.2
N$16
  Top 0.254: DRV8824.27 12.01,18.22 11.49,18.75 10.52,18.75 R7.1
N$17
  Top 0.254: DRV8824.26 12.64,19.18 M2.P$1
N$18
  Top 0.254: DRV8824.25 13.29,18.13 13.48,18.33 M1.P$1
N$19
  Top 0.254: DRV8824.24 13.94,17.93 14.35,18.34 14.35,19.18 M0.P$1
N$20
  Top 0.254: DRV1.27 39.95,18.22 39.43,18.75 38.45,18.75 R18.1
N$21
  Top 0.254: DRV1.26 40.58,19.18 M3.P$1
N$22
  Top 0.254: DRV1.25 41.23,18.13 41.42,18.33 M4.P$1
N$23
  Top 0.254: DRV1.24 41.88,17.93 42.29,18.34 42.29,19.18 M5.P$1
N$24
  Top 0.305: DRV1.1 38.15,11.31 37.75,11.71 37.75,17.31 C12.2
N$25
  Top 0.254: DRV1.2 39.93,10.56 39.81,10.44 37.57,10.44 36.66,11.35 36.66,16.79 C12.1
N$26
  Top 0.305: DRV1.9 44.48,9.13 R20.2
N$27
  Top 0.254: DRV1.18 45.78,19.3 R17.1
N$28
  Top 0.305: R25.1 35.9,32.01 GRN2.C
N$29
  Top 0.305: R24.1 35.87,35.86 RED2.C
N$30
  Top 0.305: DRV2.6 70.47,9.55 69.92,9 69.92,7.62 R28.2
N$31
  Top 0.254: DRV2.27 67.89,18.22 67.37,18.75 66.39,18.75 R27.1
N$32
  Top 0.254: DRV2.26 68.52,19.18 M6.P$1
N$33
  Top 0.254: DRV2.25 69.17,18.13 69.36,18.33 M7.P$1
N$34
  Top 0.254: DRV2.24 69.82,17.93 70.23,18.34 70.23,19.18 M8.P$1
N$35
  Top 0.305: DRV2.1 66.09,11.31 65.69,11.71 65.69,17.31 C17.2
N$36
  Top 0.254: DRV2.2 67.87,10.56 67.75,10.44 65.51,10.44 64.6,11.35 64.6,16.79 C17.1
N$37
  Top 0.305: DRV2.9 72.42,9.13 R29.2
N$38
  Top 0.254: DRV2.18 73.72,19.3 R26.1
N$39
  Top 0.305: R34.1 63.84,32.01 GRN3.C
N$40
  Top 0.305: R33.1 63.81,35.86 RED3.C
N$41
  Top 0.254: C21.2 127.71,20.21 128.31,19.61 129.9,19.61 132.82,16.69 132.82,14.95 U$19.P$1
N$42
  Top 0.254: C22.2 130.18,18.57 131.17,17.58 131.17,16.37 131.61,15.93 131.61,14.6 131.93,14.28 U$19.P$2
N$43
  Top 0.254: C22.1 127.83,18.57 128.69,17.71 130.34,17.71 130.66,17.39 130.66,16.18 131.17,15.67 131.17,14.4 131.95,13.63 U$19.P$3
N$44
  Top 0.254: U$19.P$7 131.82,11.03 130.34,12.5 C25.2
N$45
  Top 0.305: 2N7002P4.3 131.36,30.02 132.95,31.61 132.95,32.67 R37.1
N$46
  Top 0.305: R40.1 127.97,34.44 RED4.C
N$47
  Top 0.305: GRN4.C 132.87,35.96 R41.1
PWM  (via drill 0.38)
  Top 0.305: 2N7002P1.2 R5.1 100.09,25.81 v99.61,25.33 | v112.56,7.17 112.44,7.17 111.87,7.74 110.5,7.74 U$2.P$13
  Bottom 0.305: v99.61,25.33 99.36,25.01 99.04,24.69 99.04,6.53 100.18,5.39 110.79,5.39 v112.56,7.17
PWM1  (via drill 0.38)
  Top 0.305: 2N7002P4.2 R39.1 128.03,25.81 v127.55,25.33 | v140.5,7.17 140.38,7.17 139.81,7.74 138.44,7.74 U$19.P$13
  Bottom 0.305: v127.55,25.33 127.3,25.01 126.98,24.69 126.98,6.53 128.12,5.39 138.73,5.39 v140.5,7.17
SCL  (via drill 0.38)
  Top 0.254: R1.2 102.1,9.08 U$2.P$10
  Top 0.305: v101.52,8.44 101.53,8.44 R1.2 | U$1.P$45 113.79,19.59 112.75,20.63 112.75,23.42 111.23,24.95 102.66,24.95 v100.63,22.91
  Bottom 0.305: v101.52,8.44 101.49,8.46 R1.2 100.63,9.28 v100.63,22.91
SCL1  (via drill 0.38)
  Top 0.254: R35.2 130.04,9.08 U$19.P$10
  Top 0.305: v129.46,8.44 129.47,8.44 R35.2 | U$18.P$45 141.73,19.59 140.69,20.63 140.69,23.42 139.17,24.95 130.6,24.95 v128.57,22.91
  Bottom 0.305: v129.46,8.44 129.44,8.46 R35.2 128.57,9.28 v128.57,22.91
SDA  (via drill 0.38)
  Top 0.254: 101.69,6.54 R2.2 102.39,6.54 102.74,6.89 102.74,7.99 103.18,8.43 U$2.P$11
  Top 0.305: v114.34,21.39 114.34,23.48 111.74,25.64 101.58,25.64 v99.8,23.93
  Bottom 0.305: U$1.P$14 115.14,20.59 v114.34,21.39 | v99.8,23.93 99.86,8.17 R2.2
  other vias: 101.49,6.54
SDA1  (via drill 0.38)
  Top 0.254: 129.63,6.54 R36.2 130.33,6.54 130.69,6.89 130.69,7.99 131.12,8.43 U$19.P$11
  Top 0.305: v142.28,21.39 142.28,23.48 139.68,25.64 129.52,25.64 v127.74,23.93
  Bottom 0.305: U$18.P$14 143.08,20.59 v142.28,21.39 | v127.74,23.93 127.8,8.17 R36.2
  other vias: 129.43,6.54
STEP  (via drill 0.38)
  Top 0.254: DRV8824.22 15.24,28.1
  Top 0.305: 15.24,28.1 14.98,28.1 v14.46,28.63
  Bottom 0.254: 24.05,28.66 22.69,28.66 U$6.P$22@1
  Bottom 0.305: v14.46,28.63 22.66,28.63 22.69,28.66
STEP1  (via drill 0.38)
  Top 0.254: DRV1.22 43.18,28.1
  Top 0.305: 43.18,28.1 42.92,28.1 v42.4,28.63
  Bottom 0.254: 51.99,28.66 50.63,28.66 U$10.P$22@1
  Bottom 0.305: v42.4,28.63 50.6,28.63 50.63,28.66
STEP2  (via drill 0.38)
  Top 0.254: DRV2.22 71.12,28.1
  Top 0.305: 71.12,28.1 70.86,28.1 v70.34,28.63
  Bottom 0.254: 79.93,28.66 78.57,28.66 U$14.P$22@1
  Bottom 0.305: v70.34,28.63 78.54,28.63 78.57,28.66
SW
  Top 0.254: U$2.P$4 103.96,12.98 102.72,14.21 102.72,15.5 L1.2
SW1
  Top 0.254: U$19.P$4 131.9,12.98 130.66,14.21 130.66,15.5 L2.2
U
  Top 0.254: U$1.P$33 120.99,6.08 | U$2.P$18 110.45,10.71
  Top 0.305: 110.45,10.71 U$2.P$17
  Top 0.61: U$1.P$34 120.99,6.08
  Top 1.016: 110.45,10.71 112.45,10.71 117.07,6.08 120.99,6.08
U1
  Top 0.254: U$18.P$33 148.94,6.08 | U$19.P$18 138.39,10.71
  Top 0.305: 138.39,10.71 U$19.P$17
  Top 0.61: U$18.P$34 148.94,6.08
  Top 1.016: 138.39,10.71 140.39,10.71 145.01,6.08 148.94,6.08
V
  Top 0.254: U$2.P$20 110.45,12 | U$1.P$35 120.99,8.09
  Top 0.305: 110.45,12 U$2.P$19
  Top 0.61: U$1.P$36 120.99,8.09
  Top 1.016: 110.45,12 113.19,12 117.14,8.05 120.96,8.05 120.99,8.09
V1
  Top 0.254: U$19.P$20 138.39,12 | U$18.P$35 148.94,8.09
  Top 0.305: 138.39,12 U$19.P$19
  Top 0.61: U$18.P$36 148.94,8.09
  Top 1.016: 138.39,12 141.13,12 145.08,8.05 148.9,8.05 148.94,8.09
V3P1
  Top 0.254: R36.1 R35.1 127.76,8.47 C24.2 130.5,9.73 U$19.P$9
V3P3
  Top 0.254: R2.1 R1.1 99.82,8.47 C7.2 102.56,9.73 U$2.P$9
VCC
  Top 0.254: U$2.P$23 110.45,14.59
  Top 0.406: U$3.P$3 110.55,18.81 109.07,17.32 105.2,17.32 103.8,18.72 103.8,19.8 102.91,20.69 101.52,20.69 C2.1
  Top 0.61: U$1.VCC@1 U$1.VCC@2 U$1.VCC@3
  Top 1.016: U$1.VCC@2 110.45,14.59 U$2.P$24 110.58,15.06 U$3.P$3
VCC1  (via drill 0.51)
  Top 0.305: U$6.VCC@1 U$6.VCC@2 U$6.VCC@3
  Top 0.406: C8.1 R12.1 C9.1 5.88,11.45 9.48,7.85 U$7.P$3 13.29,10.38 DRV8824.4 | DRV8824.11 17.84,10.54 19.06,9.32 19.44,9.32 v19.56,9.2
  Top 1.27: 22.87,14.65 21.85,13.64 21.85,10.34 20.71,9.2 v20.58,9.2 v19.56,9.2
  Top 1.778: U$6.VCC@2 22.87,14.65
  Bottom 1.27: U$7.P$3 10.76,8.64 12.71,10.59 18.17,10.59 v19.56,9.2 v20.58,9.2 20.71,9.2
VCC2  (via drill 0.51)
  Top 0.305: U$10.VCC@1 U$10.VCC@2 U$10.VCC@3
  Top 0.406: C13.1 R21.1 C14.1 33.82,11.45 37.42,7.85 U$11.P$3 41.23,10.38 DRV1.4 | DRV1.11 45.78,10.54 47,9.32 47.38,9.32 v47.5,9.2
  Top 1.27: 50.81,14.65 49.79,13.64 49.79,10.34 48.65,9.2 v48.52,9.2 v47.5,9.2
  Top 1.778: U$10.VCC@2 50.81,14.65
  Bottom 1.27: U$11.P$3 38.7,8.64 40.65,10.59 46.11,10.59 v47.5,9.2 v48.52,9.2 48.65,9.2
VCC3  (via drill 0.51)
  Top 0.305: U$14.VCC@1 U$14.VCC@2 U$14.VCC@3
  Top 0.406: C18.1 R30.1 C19.1 61.76,11.45 65.36,7.85 U$15.P$3 69.17,10.38 DRV2.4 | DRV2.11 73.72,10.54 74.94,9.32 75.32,9.32 v75.44,9.2
  Top 1.27: 78.75,14.65 77.73,13.64 77.73,10.34 76.59,9.2 v76.46,9.2 v75.44,9.2
  Top 1.778: U$14.VCC@2 78.75,14.65
  Bottom 1.27: U$15.P$3 66.64,8.64 68.59,10.59 74.05,10.59 v75.44,9.2 v76.46,9.2 76.59,9.2
VCC4
  Top 0.254: U$19.P$23 138.39,14.59
  Top 0.406: U$20.P$3 138.49,18.81 137.01,17.32 133.14,17.32 131.74,18.72 131.74,19.8 130.85,20.69 129.46,20.69 C21.1
  Top 0.61: U$18.VCC@1 U$18.VCC@2 U$18.VCC@3
  Top 1.016: U$18.VCC@2 138.39,14.59 U$19.P$24 138.52,15.06 U$20.P$3
VCP
  Top 0.254: DRV8824.3 12.64,10.55 12.05,9.96 9.1,9.96 7.58,11.43 C9.2
  Top 0.406: R12.2 C9.2
VCP1
  Top 0.254: DRV1.3 40.58,10.55 39.99,9.96 37.04,9.96 35.52,11.43 C14.2
  Top 0.406: R21.2 C14.2
VCP2
  Top 0.254: DRV2.3 68.52,10.55 67.93,9.96 64.98,9.96 63.46,11.43 C19.2
  Top 0.406: R30.2 C19.2
VREG
  Top 0.254: L1.1 99.91,16.46 100.88,15.48 100.88,15.3 C5.2 | C5.2 101.63,14.48 | U$2.P$6 103.99,11.68 103.1,12.56 103.1,13.08 C5.2
VREG1
  Top 0.254: L2.1 127.85,16.46 128.82,15.48 128.82,15.3 C23.2 | C23.2 129.57,14.48 | U$19.P$6 131.93,11.68 131.04,12.56 131.04,13.08 C23.2
W
  Top 0.254: U$2.P$22 110.45,13.3 | U$1.P$37 120.99,10.1
  Top 0.305: 110.45,13.3 U$2.P$21
  Top 0.61: U$1.P$38 120.99,10.09 120.82,10.09
  Top 1.016: 110.45,13.3 114.05,13.3 117.26,10.09 120.82,10.09 120.98,10.09 120.99,10.1
W1
  Top 0.254: U$19.P$22 138.39,13.3 | U$18.P$37 148.94,10.1
  Top 0.305: 138.39,13.3 U$19.P$21
  Top 0.61: U$18.P$38 148.94,10.09 148.76,10.09
  Top 1.016: 138.39,13.3 141.99,13.3 145.2,10.09 148.76,10.09 148.92,10.09 148.94,10.1

## Text on the board
Top: Pocket NC DRV8824 Swap Drive Panel Rev A | Pocket NC DRV10983 Swap Drive Panel Rev A
tNames: Swap Drive | Swap Drive | Swap Drive | Swap Drive | Swap Drive | DRV8824 | DRV8824 | DRV8824 | DRV10983 | Rev D | DRV10983 | Rev D | Rev D | Rev D | Rev D
tStop: Pocket NC DRV8824 Swap Drive Panel Rev A | Pocket NC DRV10983 Swap Drive Panel Rev A